# Altium PCB TSAL_Control - copia.PcbDoc (part 1 of 2)
Units mm, origin at the board's own origin, x right, y up, seen from the top; angles counter-clockwise.
Board outline 110 x 55.6 mm, 4 copper layers (Top Layer, GND, PWR, Bottom Layer), stack 1.488 mm thick; 168 components, 78 nets, 452 pads, 56 vias.
Unrouted connection lines stored in the file: 329.
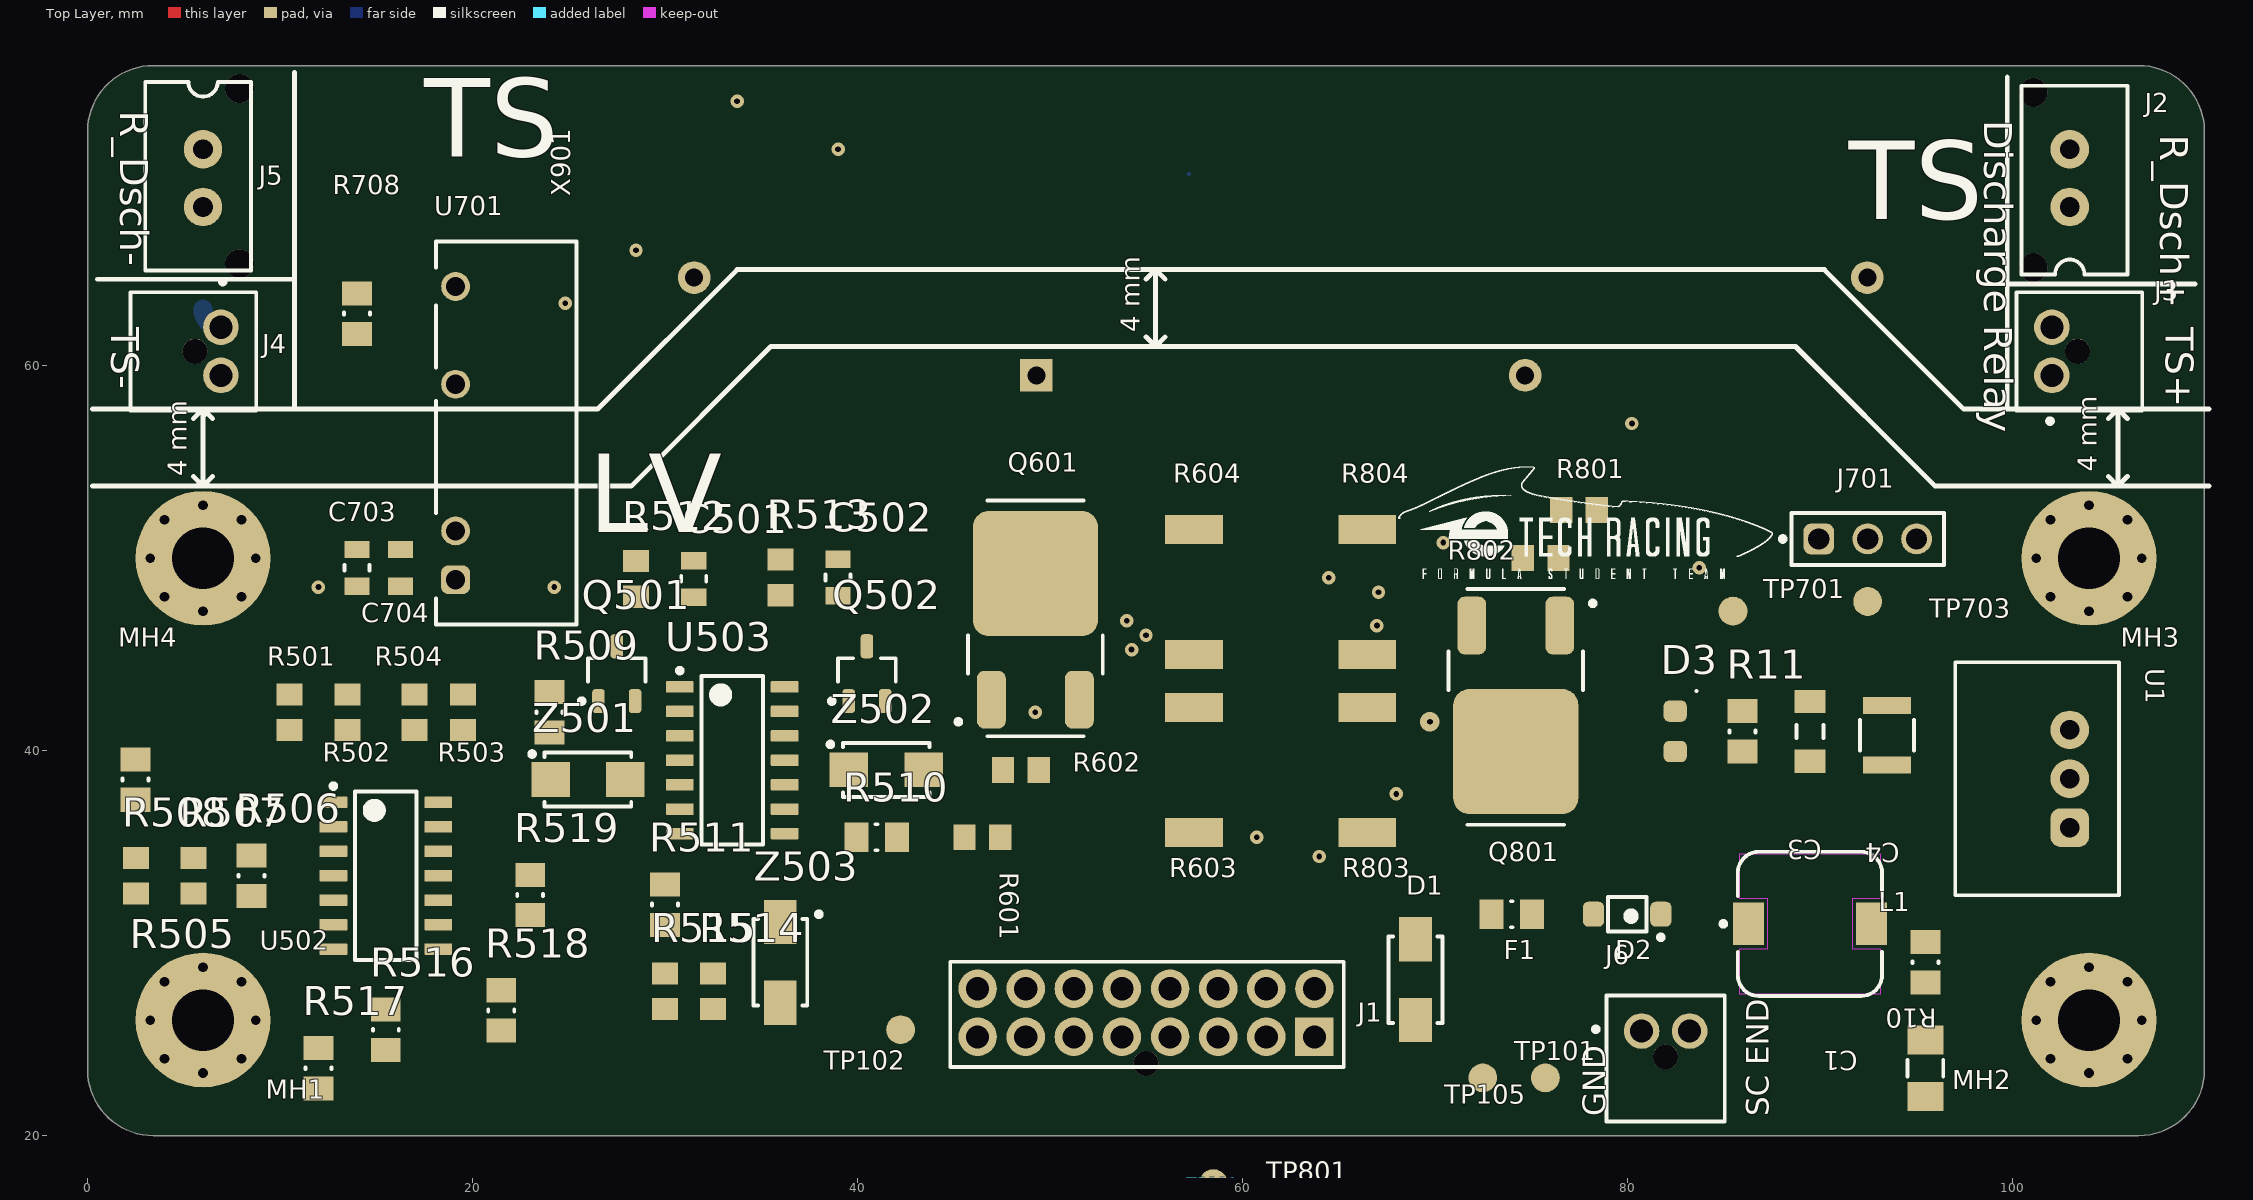
[diagram p0: Top Layer view]
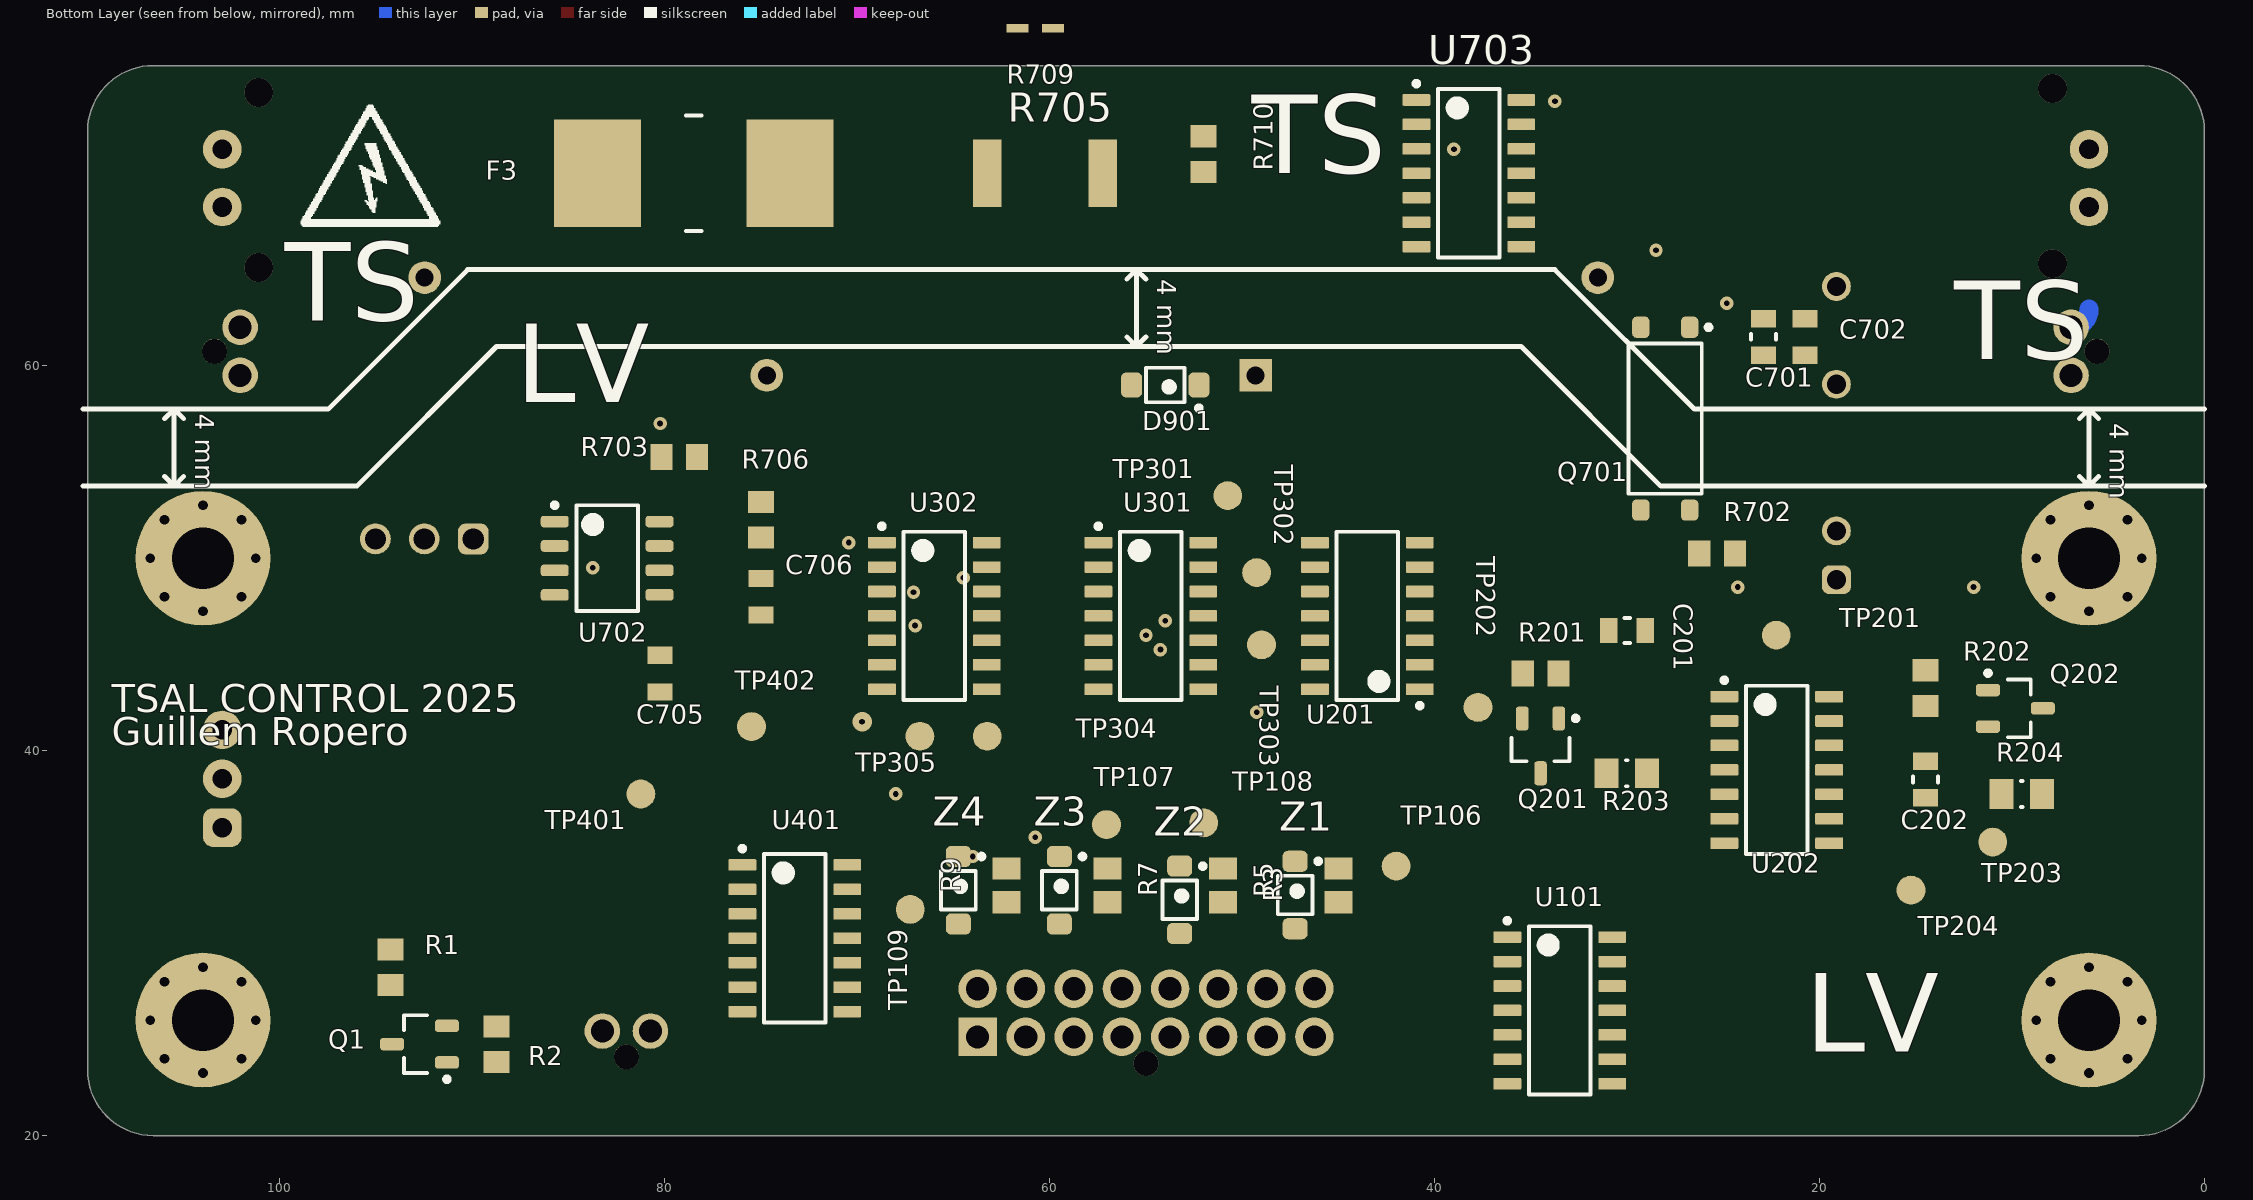
[diagram p1: Bottom Layer view, seen from below]
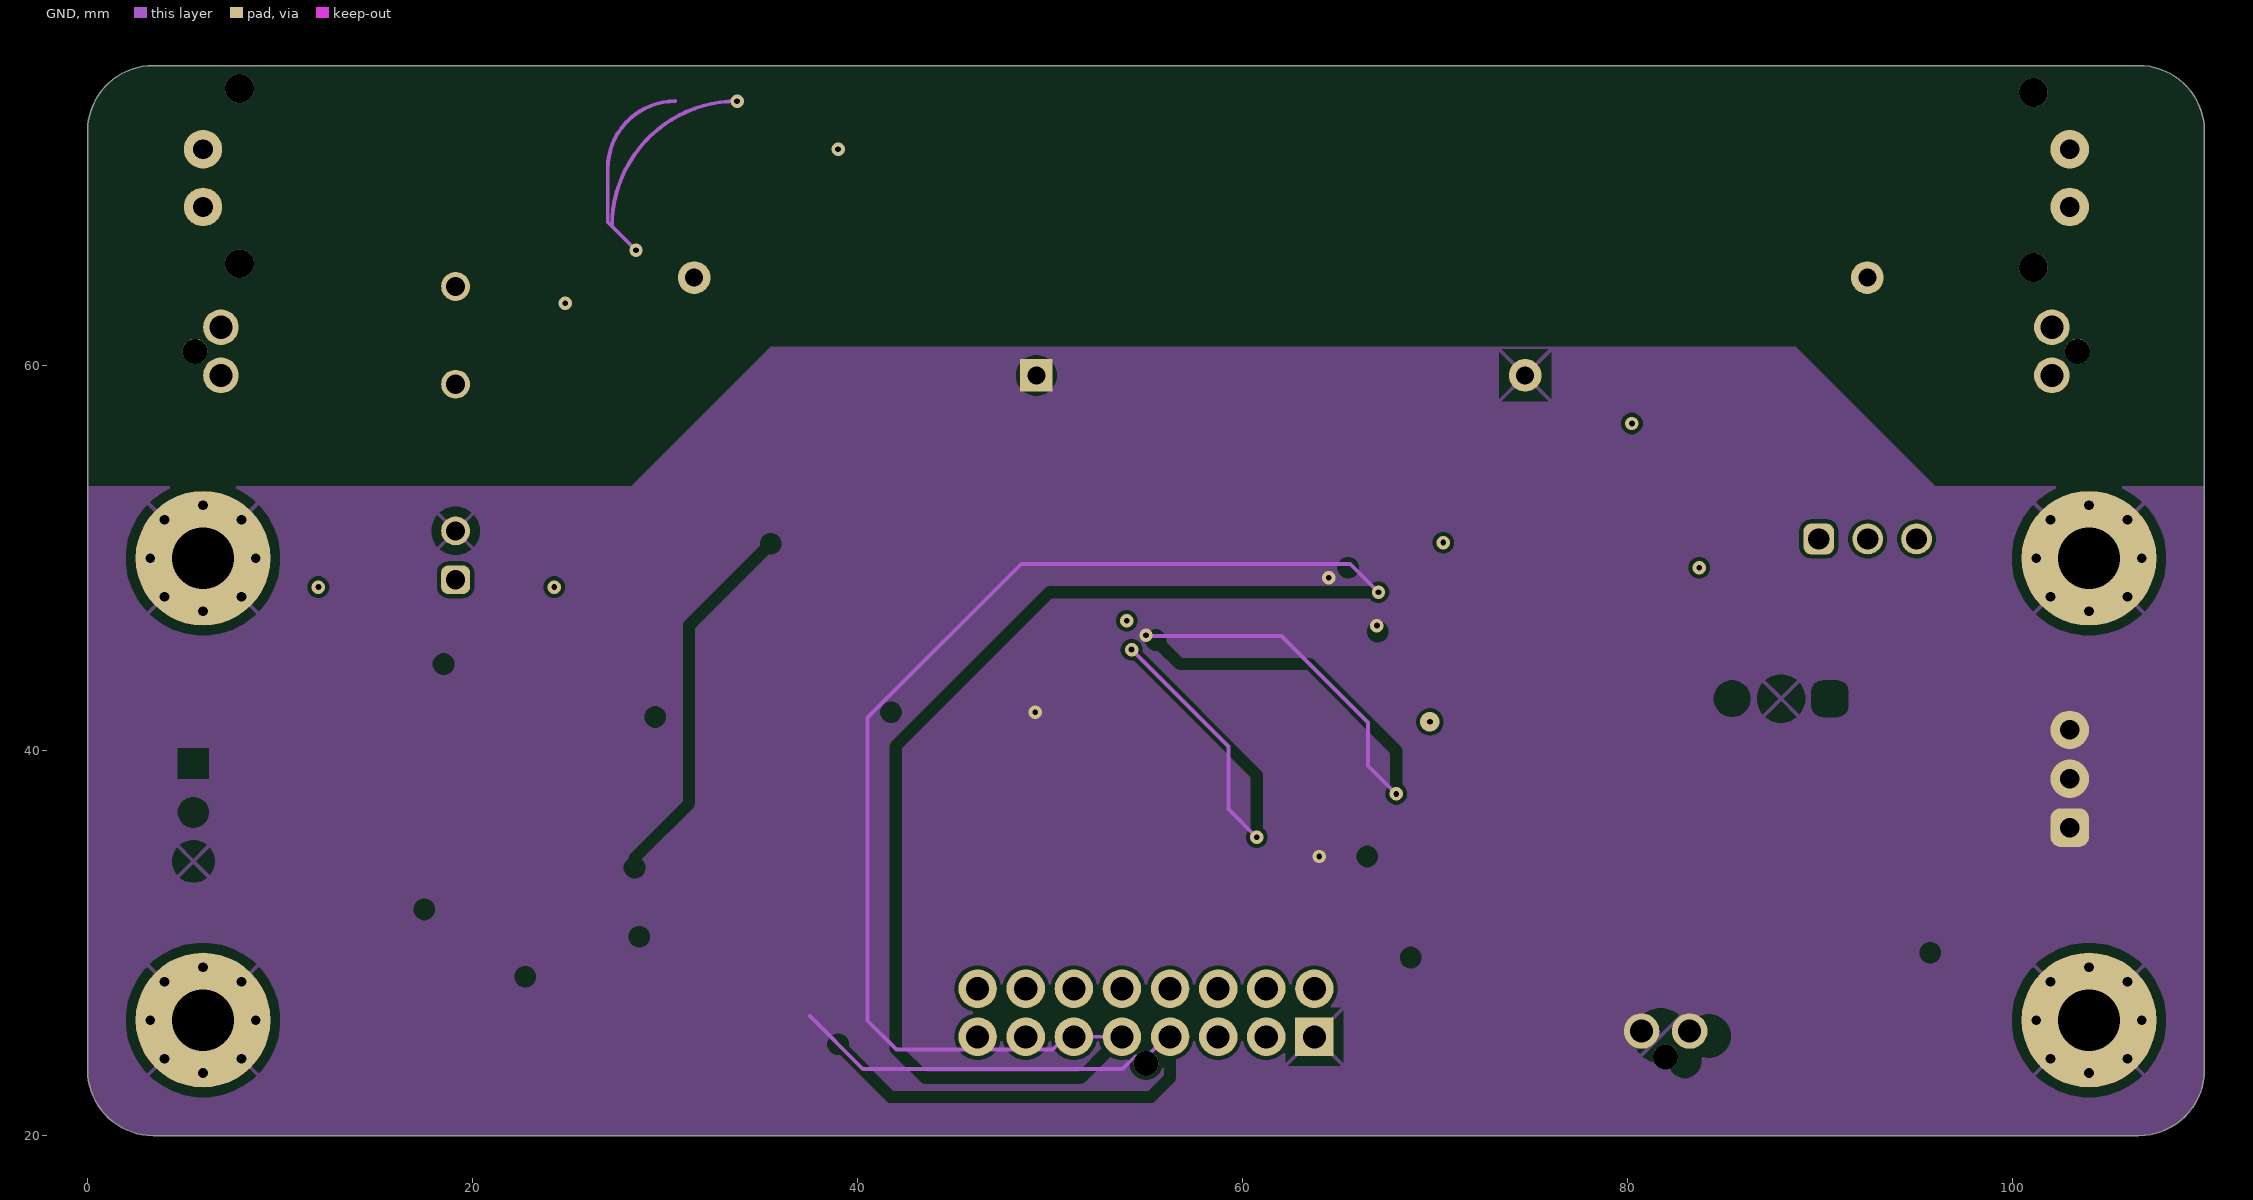
[diagram p2: GND]
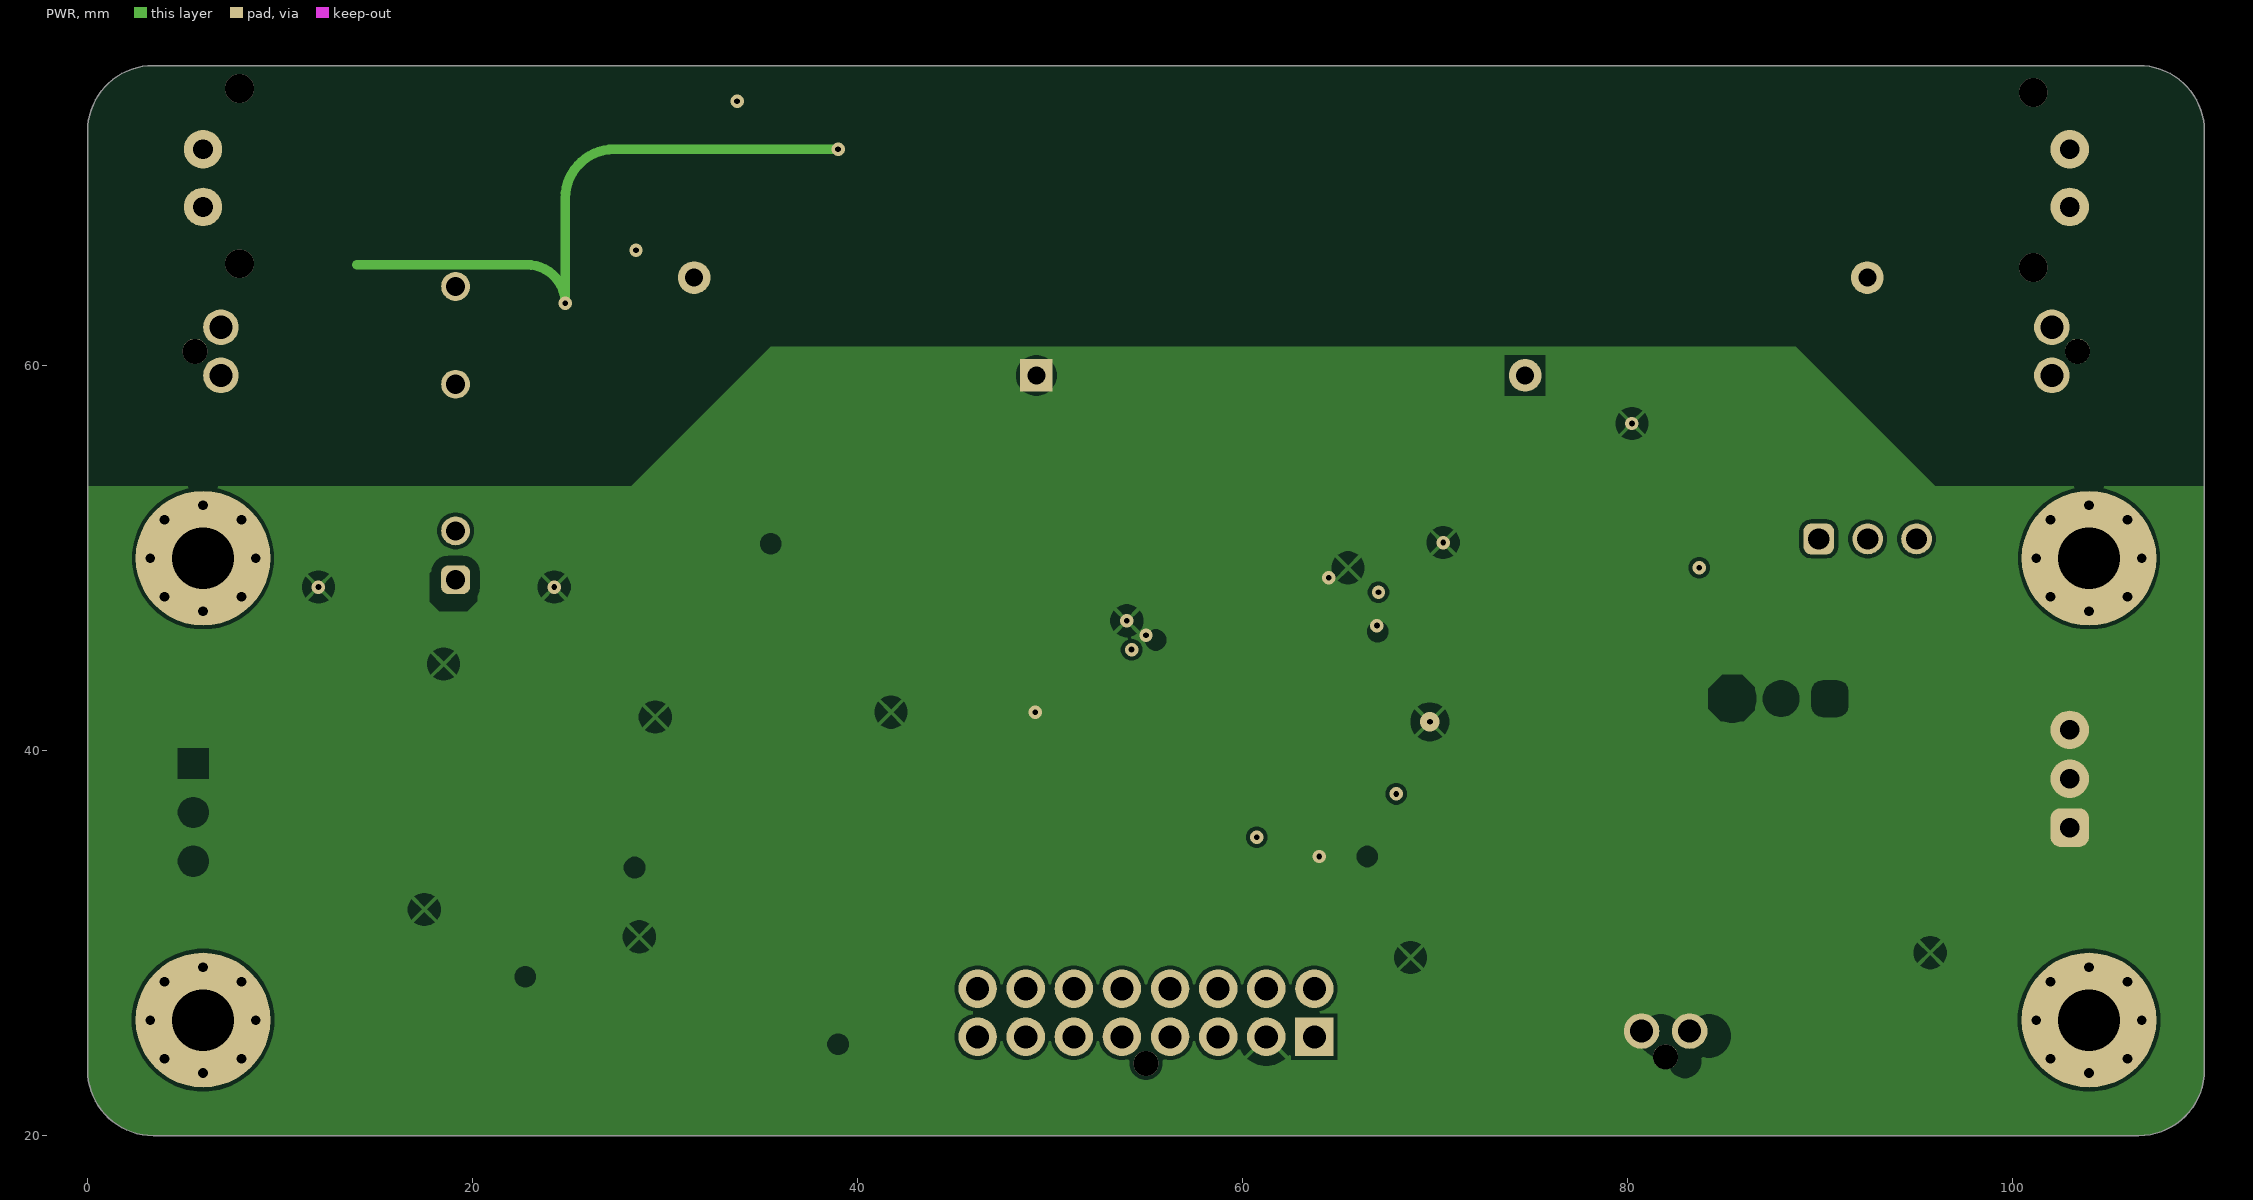
[diagram p3: PWR]

## Layer stack, top to bottom
Top Solder: solder mask 0.01, Solder Resist, Dk 3.5
Top Layer: signal copper 0.035
Dielectric 2: prepreg 0.1, PP-006, Dk 4.1
GND: signal copper 0.009
Dielectric 6: prepreg 0.1, PP-006, Dk 4.1
Dielectric 1: dielectric 1, FR-4, Dk 4.8
Dielectric 7: prepreg 0.1, PP-006, Dk 4.1
PWR: signal copper 0.009
Dielectric 3: prepreg 0.1, PP-006, Dk 4.1
Bottom Layer: signal copper 0.035
Bottom Solder: solder mask 0.01, Solder Resist, Dk 3.5

## Board outline
0,23.414 0,72 0,72.186 cw(c3.414,72.186) 3.414,75.6 106.5,75.6 106.586,75.6 cw(c106.586,72.186) 110,72.186 110,72 110,23.414 cw(c106.586,23.414) 106.586,20 106.5,20 3.414,20 cw(c3.414,23.414)

## Design rules (kind name [scope] priority, off if disabled: settings)
Clearance Clearance_TS-LVS [InNetClass('TS') vs InNetClass('LVS')] p1: gap=4 ignorepadtopadclearanceinfootprint=FALSE
Clearance Clearance_std [All] p2: gap=0.2 ignorepadtopadclearanceinfootprint=FALSE
ComponentClearance [All] p1: gap=0.2 collisioncheckmode=3 verticalgap=0.2 showdistances=FALSE
HoleSize [All] p1: absolutevalues=TRUE maxlimit=4 minlimit=0.2 maxpercent=80.000 minpercent=20.000
PasteMaskExpansion [All] p1: expansion=0.15
PlaneClearance [All] p1: clearance=0.5
PlaneConnect [All] p1: planeconnectstyle=Relief reliefexpansion=0.5 reliefentries=4 reliefconductorwidth=0.2 reliefairgap=0.2
PolygonConnect [All] p1: connectstyle=Relief reliefconductorwidth=0.2 reliefentries=4 polygonreliefangle="45 Angle" airgapwidth=0.5
RoutingVias [All] p1: holewidth=0.3 width=0.7 viastyle="Through Hole" minholewidth=0.2 minwidth=0.5 maxholewidth=4 maxwidth=8
SilkToSilkClearance [All] p1: silktosilkclearance=0
SilkToSolderMaskClearance [IsPad] p1: minsilkscreentomaskgap=0.1 clearancetoexposedcopper=TRUE
SolderMaskExpansion [All] p1: expansion=0.1 istentingtop=FALSE
UnRoutedNet [All] p1: checkbadconnections=TRUE
Width [All] p1: maxlimit=3 minlimit=0.2 preferedwidth=0.5
22 further rules are at their usual default settings.

## Classes and differential pairs
component class Discharge_circuit: D901 R901 TP901 U901 X901
component class "TSAL Red": C701 C702 C703 C704 C705 C706 HV_DET_TRIG J701 Q701 R701 R702 R703 R704 R705 R706 R707 R708 R709 R710 TP701 TP702 TP703 TP704 TP705 TS_ON U701 U702 U703
component class "TSAL Green": AIR+_COIL AIR+_STATE AIR-_COIL AIR-_STATE C101 C111 HV_ACCU PRE_COIL PRE_STATE SC_END TP101 TP102 TP103 TP104 TP105 TP106 TP107 TP108 TP109 TS_OFF U101
component class "Relay Implausibility": AIR+_IMPL AIR-_IMPL C301 C302 C333 PRE_IMPL RELAY_STATE_DET RELAYS_IMPL TP301 TP302 TP303 TP304 TP305 U301 U302
component class "Red Driver": Q801 R801 R802 R803 R804 TP801 TP802 TSAL_RED
component class Implausibilities: C201 C202 C203 C204 C223 IMPL_UNDLY IMPLAUSIBILITIES LATCH_RST Q201 Q202 R201 R202 R203 R204 SAFE_STATE TP201 TP202 TP203 TP204 U201 U202
component class TSAL_Control: C1 C3 C4 D1 D2 D3 F1 F3 F_DC_BUS1 F_DC_BUS? F_TS-? J2 J3 J4 J5 J6 J_TS+_DC_BUS1 J_TS+_DC_BUS? J_TS- L1 MH1 MH2 MH3 MH4 Q1 R1 R2 R3 R5 R7 R9 R10 R11 U1 Z1 Z2 Z3 Z4
component class SCS: AIR+_SCS AIR-_SCS C501 C502 C503 C504 C505 C555 HV_ACCU_SCS PRE_SCS Q501 Q502 R501 R502 R503 R504 R505 R506 R507 R508 R509 R510 R511 R512 R513 R514 R515 R516 R517 R518 R519 SCS_ERROR TP501 TP502 TP503 TP504 TP505 TP506 TP507 TP508 TP509 TP510 TP511 TP512 TP513 U501 U502 U503 V_REF Z501 Z502 Z503
component class "EV 4.10.14": C401 C444 NO_HV_REL_CLS NOT_INT_REL_STATE TP401 TP402 U401
component class "Green Driver": Q601 R601 R602 R603 R604 TP601 TP602 TSAL_GREEN

## Components (designator, comment, footprint, x,y, rotation, side; value= is the part's Value field where it differs from the comment)
C1 "C1u-50V-1206" FP-CL31-IPC_A 95.5,23.5 r270 top value=1µF
C3 "C100n-25V-1206FNPC-X7R" C1206FNPC-RW 89.5,41 r270 top value=100nF
C4 "C22u-25V-1210" WCAP-CSGP_1210_L3.2W2.5H2.5 93.5,40.8 r270 top
C101 "C100n-50V-0805FNPC-X7R" C0805FNPC-R 30.75,110 r90 top value=100nF
C111 "C15p-50V-0805FNPC-NP0" C0805FNPC-R 52,129.55 r90 top value=15pF
C201 "C10u-16V-0805FNPC-X5R" C0805FNPC-R 30,46.25 r180 bottom value=10µF
C202 "C10u-16V-0805FNPC-X5R" C0805FNPC-R 14.5,38.5 r270 bottom value=10µF
C203 "C100n-50V-0805FNPC-X7R" C0805FNPC-R 45.5,103 r90 top value=100nF
C204 "C100n-50V-0805FNPC-X7R" C0805FNPC-R 52.75,103 r90 top value=100nF
C223 "C15p-50V-0805FNPC-NP0" C0805FNPC-R 41,140.55 r90 top value=15pF
C301 "C100n-50V-0805FNPC-X7R" C0805FNPC-R 30.25,103 r90 top value=100nF
C302 "C100n-50V-0805FNPC-X7R" C0805FNPC-R 37.25,103 r90 top value=100nF
C333 "C15p-50V-0805FNPC-NP0" C0805FNPC-R 29,140.5 r90 top value=15pF
C401 "C100n-50V-0805FNPC-X7R" C0805FNPC-R 54,92.55 r90 top value=100nF
C444 "C15p-50V-0805FNPC-NP0" C0805FNPC-R 29,130.75 r90 top value=15pF
C501 "C100n-50V-0805FNPC-X7R" C0805FNPC-R 31.5,48.925 r270 top value=100nF
C502 "C100n-50V-0805FNPC-X7R" C0805FNPC-R 39,49 r270 top value=100nF
C503 "C100n-50V-0805FNPC-X7R" C0805FNPC-R 30.75,93.5 r90 top value=100nF
C504 "C100n-50V-0805FNPC-X7R" C0805FNPC-R 38,93.5 r90 top value=100nF
C505 "C100n-50V-0805FNPC-X7R" C0805FNPC-R 45.5,93.5 r90 top value=100nF
C555 "C15p-50V-0805FNPC-NP0" C0805FNPC-R 41,130 r90 top value=15pF
C701 "C1u-50V-0805FNPC-X7R" C0805FNPC-R 22.921,61.5 r270 bottom value=1µF
C702 "C100n-16V-0805" WCAP-CSGP_0805_L2W1.25H0.8_Reflow 20.75,61.5 r270 bottom
C703 "C1u-50V-0805FNPC-X7R" C0805FNPC-R 14,49.5 r90 top value=1µF
C704 "C100n-16V-0805" WCAP-CSGP_0805_L2W1.25H0.8_Reflow 16.25,49.5 r90 top
C705 "C100n-16V-0805" WCAP-CSGP_0805_L2W1.25H0.8_Reflow 80.25,44 r270 bottom value=100nF
C706 "C22u-25V-0805" WCAP-CSGP_0805_L2W1.25H0.8_Reflow 75,48 r270 bottom value=22uF
D1 "TVS_33V_400W" WE-TVSP_DO-214AC_Bidirectional 69,28.1 r270 top
D2 "DSC-0.5/30-SOD123" DSC-SOD123 80,31.5 r180 top
D3 "LEDGS-0805-450" LED_0805_WE 82.5,41 r270 top
D901 "DSC-0.5/30-SOD123" DSC-SOD123 54,59 r0 bottom
F1 "MFU0805FF00500P500" 0805 74,31.5 r270 top value=0.5A-50V
F3 "Fuse_1A_600V" Fuse_485001 78.5,70 r0 bottom
J1 "J_NanoFit_2x8_V" J_NanoFit_2x8_V 55,30 r180 top
J2 "J_MicroFit_2x1" J_MicroFit_2x1 103,68.25 r270 top
J3 "J_NanoFit_1x2" FP-105309-1102-MFG 103.5,60.75 r90 top
J4 "J_NanoFit_1x2" FP-105309-1102-MFG 5.5,60.75 r270 top
J5 "J_MicroFit_2x1" J_MicroFit_2x1 6,71.25 r90 top
J6 "J_NanoFit_1x2" FP-105309-1102-MFG 82,24 r0 top
J701 "3Pin-Pinheader" 61300311121 92.5,51 r0 top
L1 "3.3uH" WE-PD_7345 89.5,31 r0 top
MH1 "Mounting_Hole_M3" Mounting_Hole_M3 6,26 r0 top
MH2 "Mounting_Hole_M3" Mounting_Hole_M3 104,26 r0 top
MH3 "Mounting_Hole_M3" Mounting_Hole_M3 104,50 r0 top
MH4 "Mounting_Hole_M3" Mounting_Hole_M3 6,50 r0 top
Q1 "TRT-NCH" TRT-NCH-3/35-CPH 92.75,24.75 r0 bottom
Q201 "TRT-PCH-2/30-BSS" TRT-PCH-2/30-BSS 34.5,40.25 r270 bottom
Q202 "TRT-PCH-2/30-BSS" TRT-PCH-2/30-BSS 9.825,42.2 r180 bottom
Q501 "TRT-NCH-8/40-SQ" TRT-NCH-3/35-CPH 27.5,44 r90 top
Q502 "TRT-NCH-8/40-SQ" TRT-NCH-3/35-CPH 40.5,44 r90 top
Q601 "TRT-NCH" TRT-NCH-D2PAK 49.25,46.75 r0 top
Q701 "Optocoupler" WL-OCPT_LSOP4 28.02,57.25 r270 bottom
Q801 "TRT-NCH" TRT-NCH-D2PAK 74.214,42.4 r180 top
R1 "10kR" R0805FTK 94.25,28.75 r270 bottom value=10k
R2 "R10k-0805FTK" R0805FTK 88.75,24.75 r90 bottom value=10kR
R3 "R100k-0805" RESC2013X70X40NL20T20 45,33 r90 bottom value=100k
R5 "R100k-0805" RESC2013X70X40NL20T20 51,33 r90 bottom value=100k
R7 "R100k-0805" RESC2013X70X40NL20T20 57,33 r90 bottom value=100k
R9 "R100k-0805" RESC2013X70X40NL20T20 62.25,33 r90 bottom value=100k
R10 "R10_0805_0.25W" 0805 95.5,29 r0 top
R11 "R1K-0805-0.5W" 0805 86,41 r180 top value=1k
R201 "R10k-0805FTK" R0805FTK 34.5,44 r0 bottom value=10k
R202 "R10k-0805FTK" R0805FTK 14.5,43.25 r270 bottom value=10k
R203 "R1K-0805-0.5W" 0805 30.021,38.829 r270 bottom value=1k
R204 "R1K-0805-0.5W" 0805 9.5,37.75 r90 bottom value=1k
R501 "R1k-0805FTK" R0805FTK 10.5,42 r270 top value=1k
R502 "R1k-0805FTK" R0805FTK 13.5,42 r270 top value=1k
R503 "R1k-0805FTK" R0805FTK 19.5,42 r270 top value=1k
R504 "R1k-0805FTK" R0805FTK 17,42 r270 top value=1k
R505 "R12K4-0805-0.125W" 0805 2.5,38.5 r180 top value=12.4k
R506 "R1K-0805-0.5W" 0805 8.515,33.5 r180 top value=1k
R507 "R100-0805FTK" R0805FTK 5.515,33.5 r270 top value=100
R508 "R100-0805FTK" R0805FTK 2.515,33.5 r270 top value=100
R509 "R2K_0.5W_0805" 0805 24,42 r180 top value=2k
R510 "R2K_0.5W_0805" 0805 41,35.5 r270 top value=2k
R511 "R1K-0805-0.5W" 0805 30,32 r180 top value=1k
R512 "R1k-0805FTK" R0805FTK 28.5,48.925 r270 top value=1k
R513 "R1k-0805FTK" R0805FTK 36,49 r270 top value=1k
R514 "R100-0805FTK" R0805FTK 32.5,27.5 r270 top value=100
R515 "R100-0805FTK" R0805FTK 30,27.5 r270 top value=100
R516 "R560K-0805" 0805 15.5,25.5 r180 top value=560k
R517 "R560K-0805" 0805 12,23.5 r180 top value=560k
R518 "R560K-0805" 0805 21.5,26.5 r180 top value=560k
R519 "R560K-0805" 0805 23,32.5 r180 top value=560k
R601 "R100-0805FTK" R0805FTK 46.5,35.5 r0 top value=100
R602 "R1k-0805FTK" R0805FTK 48.5,39 r0 top value=1k
R603 "R15_3521_2W" R_3521 57.5,39 r90 top value=15
R604 "R15_3521_2W" R_3521 57.5,48.25 r90 top value=15
R701 "R470-0805FTK" R0805FTK 85,92 r90 bottom value=470
R702 "R10k-0805FTK" R0805FTK 25.325,50.25 r0 bottom value=10k
R703 "R100-0805FTK" R0805FTK 79.25,55.25 r180 bottom value=100
R704 "R10k_0805_0.25W" 0805 77.75,92.75 r180 bottom
R705 "R2M-2512FTK" R2512FTK 60.25,70 r180 bottom
R706 "R10k-0805FTK" R0805FTK 75,52 r270 bottom value=10k
R707 "R51k_0805" 0805 70.5,92.75 r180 bottom value=51k
R708 "R2K_0.5W_0805" 0805 14,62.71 r0 top value=2k
R709 "R100-0805FTK" R0805FTK 60.75,78 r180 bottom value=100
R710 "R100-0805FTK" R0805FTK 52,71 r90 bottom value=100
R801 "R100-0805FTK" R0805FTK 77.5,52.5 r180 top value=100
R802 "R1k-0805FTK" R0805FTK 75.5,50 r180 top value=1k
R803 "R15_3521_2W" R_3521 66.5,39 r90 top value=15
R804 "R15_3521_2W" R_3521 66.5,48.25 r90 top value=15
R901 "R10k_0805_0.25W" 0805 95,93.25 r0 top
TP101 "TestPoint" TestPoint 72.5,23 r90 top
TP102 "TestPoint" TestPoint 42.25,25.5 r90 top
TP103 "TestPoint" TestPoint 25,12.25 r90 top
TP104 "TestPoint" TestPoint 22,14 r90 top
TP105 "TestPoint" TestPoint 75.75,23 r90 top
TP106 "TestPoint" TestPoint 42,34 r90 bottom
TP107 "TestPoint" TestPoint 57.05,36.158 r90 bottom
TP108 "TestPoint" TestPoint 52,36.25 r90 bottom
TP109 "TestPoint" TestPoint 67.25,31.75 r90 bottom
TP201 "TestPoint" TestPoint 22.25,46 r90 bottom
TP202 "TestPoint" TestPoint 37.75,42.25 r90 bottom
TP203 "TestPoint" TestPoint 11,35.25 r90 bottom
TP204 "TestPoint" TestPoint 15.25,32.75 r90 bottom
TP301 "TestPoint" TestPoint 50.75,53.25 r90 bottom
TP302 "TestPoint" TestPoint 49.25,49.25 r90 bottom
TP303 "TestPoint" TestPoint 49,45.5 r90 bottom
TP304 "TestPoint" TestPoint 63.25,40.75 r90 bottom
TP305 "TestPoint" TestPoint 66.75,40.75 r90 bottom
TP401 "TestPoint" TestPoint 81.25,37.75 r90 bottom
TP402 "TestPoint" TestPoint 75.5,41.25 r180 bottom
TP501 "TestPoint" TestPoint 91.5,119.5 r90 top
TP502 "TestPoint" TestPoint 158.5,116.25 r180 top
TP503 "TestPoint" TestPoint 83,120.25 r90 top
TP504 "TestPoint" TestPoint 56.25,120.25 r90 top
TP505 "TestPoint" TestPoint 65.25,120.25 r90 top
TP506 "TestPoint" TestPoint 156.5,120.5 r180 top
TP507 "TestPoint" TestPoint 161.25,114.25 r180 top
TP508 "TestPoint" TestPoint 74,120.25 r90 top
TP509 "TestPoint" TestPoint 165,116.25 r180 top
TP510 "TestPoint" TestPoint 30.25,120.25 r90 top
TP511 "TestPoint" TestPoint 167.75,114.25 r180 top
TP512 "TestPoint" TestPoint 39,120.25 r90 top
TP513 "TestPoint" TestPoint 47.5,120.25 r90 top
TP601 "TestPoint" TestPoint 62.5,14.5 r90 top
TP602 "TestPoint" TestPoint 138.75,119.75 r180 top
TP701 "TestPoint" TestPoint 85.5,47.25 r90 top
TP702 "TestPoint" TestPoint 117.5,120 r90 top
TP703 "TestPoint" TestPoint 92.5,47.75 r90 top
TP704 "TestPoint" TestPoint 106.5,120.5 r90 top
TP705 "TestPoint" TestPoint 97.5,120.5 r90 top
TP801 "TestPoint" TestPoint 58.5,17.5 r90 top
TP802 "TestPoint" TestPoint 124.75,119.75 r180 top
TP901 "TestPoint" TestPoint 148,120.5 r90 top
U1 "DCDC-36V/12V-1A" WPME-FDSM_SIP-3_L11.6W8H10.4 101.3,38.54 r90 top
U101 "CD4073BM" D0014A_N 33.5,26.5 r180 bottom
U201 "CD4072BM" D0014A_N 43.5,47 r0 bottom
U202 "CD4011BM" D0014A_N 22.225,39 r180 bottom
U301 "CD4070BM" D0014A_N 54.75,47 r180 bottom
U302 "CD4073BM" D0014A_N 66,47 r180 bottom
U401 "CD4023BM" D0014A_N 73.25,30.25 r180 bottom
U501 "CD4072BM" D0014A_N 13.5,12.5 r180 bottom
U502 "LM339D" D0014A_N 15.5,33.5 r0 top
U503 "LM339D" D0014A_N 33.5,39.5 r0 top
U701 "DCDC_ISO_12VIN_5VOUT" WPME-FISM_SIP-7_L19.65W7.05H10.16 21.75,56.5 r90 top
U702 "Timer_SA555" Timer_SA555 83,50 r180 bottom
U703 "LM339D" D0014A_N 38.225,70 r180 bottom
U901 "PLB171" PLB171 101.75,85.5 r0 top
X901 "HV-Relay-SPST-NC-24V" HV-Relay-SPST-NC-24V 31.52,64.58 r0 top
Z1 "DZ-10V/75-SOD-123" DSC-SOD123 47.25,32.5 r270 bottom
Z2 "DZ-10V/75-SOD-123" DSC-SOD123 53.25,32.25 r270 bottom
Z3 "DZ-10V/75-SOD-123" DSC-SOD123 59.5,32.75 r270 bottom
Z4 "DZ-10V/75-SOD-123" DSC-SOD123 64.75,32.75 r270 bottom
Z501 "DZ-5.6V-DO-214AC" DO-214AC 26,38.5 r0 top
Z502 "DZ-5.6V-DO-214AC" DO-214AC 41.5,39 r0 top
Z503 "DZ-3V6-1.25W-DO-214AC" DZ-DO-214AC 36,29 r270 top

## Footprints (in the part's own frame and the unit in brackets; to place one, negate y for a bottom-side part, rotate by r counter-clockwise, add the part's x,y. Pads: shape width x height; smd on the part's side, far side on the other; paste and mask are expansions set on the pad)
0805 [mm] "Chip Resistor, 2-Leads, Body 2,60x1,50mm, IPC Medium Density"
  rect 1.55x1.25 smd: 1(0,-1.05) 2(0,1.05)
  silkscreen extent -0.67,-0.05 0.67,0.05, body extent -0.75,-1.3 0.75,1.3, height 0.6
61300311121 [mm] "Pin Header, pitch 2.54 mm, THT, Vertical, single row, 3p"
  rrect50% 1.6x1.6 hole 1.1: 1(-2.54,0)
  round 1.6 hole 1.1: 2(0,0) 3(2.54,0)
  silkscreen extent -4.53,-1.35 3.96,1.35, body extent -3.81,-1.27 3.81,1.27, height 8.57
C0805FNPC-R [mm]
  rect 0.9x1.3 smd: 1(-0.95,0) 2(0.95,0)
  silkscreen extent -0.15,-0.65 0.15,0.65, body extent -1.03,-0.63 0.97,0.63, height 0.96
C1206FNPC-RW [mm] "Chip Capacitor, 2-Leads, Body 3,20x1,60mm, IPC Medium Density"
  rect 1.2x1.6 smd: 1(-1.55,0) 2(1.55,0)
  silkscreen extent -0.35,-0.7 0.35,0.7, body extent -1.59,-0.77 1.61,0.83, height 0.91
D0014A_N [mm] "SOIC, 14-Leads, Body 8.75x4mm, Pitch 1.27mm, IPC Medium Density"
  rrect17% 1.45x0.6 smd: 1(-2.725,3.81) 2(-2.725,2.54) 3(-2.725,1.27) 4(-2.725,0) 5(-2.725,-1.27) 6(-2.725,-2.54) 7(-2.725,-3.81) 8(2.725,-3.81) 9(2.725,-2.54) 10(2.725,-1.27) 11(2.725,0) 12(2.725,1.27) 13(2.725,2.54) 14(2.725,3.81)
  silkscreen extent -2.85,-4.38 1.6,4.78, body extent -3.02,-4.32 3.02,4.32, height 1.59
DO-214AC [mm] "Molded Diode, 2-Leads, Body 4,25x2,67mm, IPC Medium Density"
  rect 2x1.8 smd: A(1.94,0) K(-1.94,0)
  silkscreen extent -3.02,-1.4 2.25,1.45, body extent -2.47,-1.4 2.47,1.4, height 2.29
DSC-SOD123 [mm] "SOIC, 2-Leads, Body 1,60x2,69mm, Pitch 1,27mm, IPC Low Density"
  rrect50% 1.1x1.3 smd: A(1.75,0) K(-1.75,0)
  silkscreen extent -1.88,-0.9 1,1.32, body extent -1.86,-0.8 1.86,0.8, height 1.36
DZ-DO-214AC [mm] "Power TVS Diode, 2-Leads. body 4.24x2.67mm"
  rect 2.3x1.7 smd: A(2.1,0) K(-2.1,0)
  silkscreen extent -2.6,-1.4 2.25,2.1, body extent -2.56,-1.33 2.56,1.34, height 2.24
FP-105309-1102-MFG [mm]
  round 1.85 hole 1.2 paste-2539.97 mask+0: 1(-1.25,1.43) 2(1.25,1.43)
  round 1.3 hole 1.3 unplated paste-2539.97 mask+0: ""(0,0.09)
  silkscreen extent -3.75,-3.27 3.07,3.27, body extent -3.17,-3.37 3.17,3.37, height 0.25
FP-CL31-IPC_A [mm]
  rect 1.505x1.858 smd paste+0 mask+0: 1(-1.476,0) 2(1.476,0)
  silkscreen extent -0.42,-0.93 0.42,0.93, body extent -2.73,-1.43 2.73,1.43, height 0.25
Fuse_485001 [mm]
  rect 4.5x5.6 smd: 1(-5,0) 2(5,0)
  silkscreen extent -0.4,-3 0.4,3, body extent -6.05,-2.25 6.05,2.25, height 4.5
HV-Relay-SPST-NC-24V [mm]
  round 1.7 hole 0.94: 1(60.96,0) 2(43.18,-5.08) 4(0,0)
  rect 1.7x1.7 hole 0.94: 3(17.78,-5.08)
  body extent -5.08,-9.02 66.04,9.01, height 19.15
J_MicroFit_2x1 [mm]
  round 2 hole 1.02: 1(0,0) 2(-3,0)
  silkscreen extent -6.3,-2.5 3.5,3, body extent -6.32,-2.47 3.32,3.1, height 10
J_NanoFit_2x8_V [mm]
  round 2 hole 1.2: 1(8.75,4.87) 2(6.25,4.87) 3(3.75,4.87) 4(1.25,4.87) 5(-1.25,4.87) 6(-3.75,4.87) 7(-6.25,4.87) 9(8.75,2.369) 10(6.25,2.369) 11(3.75,2.369) 12(1.25,2.369) 13(-1.25,2.369) 14(-3.75,2.369) 15(-6.25,2.369) 16(-8.75,2.369)
  rect 2x2 hole 1.2: 8(-8.75,4.87)
  round 1.3 hole 1.3: A(0,6.25)
  silkscreen extent -10.27,0.97 10.17,6.43, body extent -10.5,0.68 10.44,9.53, height 10.18
LED_0805_WE [mm] "SODFL, 2-Leads, Body 1,60x3,20mm, IPC Medium Density"
  rrect50% 1.1x1.2 smd: A(1.05,0) K(-1.05,0)
  silkscreen extent -2.15,1.05 -2.05,1.15, body extent -1,-0.62 1,0.63, height 0.7
Mounting_Hole_M3 [mm]
  round 7 hole 3.2: 1(0,0)
PLB171 [mm]
  rrect50% 0.65x1.55 smd: 1(0,0) 2(2.54,0) 3(5.08,0) 4(7.62,0) 5(7.62,8.7) 6(0,8.7)
  silkscreen extent -0.86,1.17 8.79,7.52, body extent -1.02,-0.35 8.64,9.05, height 2.29
R0805FTK [mm] "Chip Resistor, 2-Leads, Body 2,00x1,25mm, IPC Medium Density"
  rect 1.15x1.35 smd: 1(-0.925,0) 2(0.925,0)
  body extent -1,-0.63 1,0.63, height 0.65
R2512FTK [mm]
  rect 1.5x3.5 smd: 1(-3,0) 2(3,0)
  body extent -3.15,-1.6 3.15,1.6, height 0.66
R_3521 [mm]
  rect 1.5x3 smd: 1(-3.25,0) 2(3.25,0)
  body extent -3.17,-1.6 3.17,1.6, height 0.65
RESC2013X70X40NL20T20 [mm] "Chip Resistor, 2-Leads, Body 2.00x1.25mm, IPC Medium Density"
  rect 1.15x1.45 smd: 1(-0.875,0) 2(0.875,0)
  body extent -1.1,-0.72 1.1,0.72, height 0.7
TestPoint [mm]
  round 1.5 smd: 1(0,0)
Timer_SA555 [mm] "SOIC, 8-Leads, Body 4,90x3,90mm, Pitch 1,27mm, IPC Medium Density"
  rrect50% 1.45x0.6 smd: 1(-2.725,1.905) 2(-2.725,0.635) 3(-2.725,-0.635) 4(-2.725,-1.905) 5(2.725,-1.905) 6(2.725,-0.635) 7(2.725,0.635) 8(2.725,1.905)
  silkscreen extent -2.85,-2.75 1.6,2.88, body extent -3.01,-2.45 3.01,2.45, height 1.63
TRT-NCH-3/35-CPH [mm] "SOT23, 3-Leads, Body 2,90x2,80mm, Pitch 0,95mm, IPC Low Density"
  rrect50% 1.25x0.65 smd: D(1.425,0) G(-1.425,0.95) S(-1.425,-0.95)
  silkscreen extent -1.55,-1.5 0.8,1.95, body extent -1.4,-1.45 1.4,1.45, height 1.06
TRT-NCH-D2PAK [mm] "SOT23, 3-Leads, Body 2,90x2,80mm, Pitch 0,95mm, IPC Low Density"
  rrect25% 6.5x6.5 smd: D(0,2.45)
  rrect50% 1.5x3 smd: G(-2.286,-4.1) S(2.286,-4.1)
  silkscreen extent -4.12,-6 3.5,6.25, body extent -3.29,-5.12 3.29,4.8, height 2.29
TRT-PCH-2/30-BSS [mm] "SOT23, 3-Leads, Body 2,90x2,80mm, Pitch 0,95mm, IPC Low Density"
  rrect50% 1.25x0.65 smd: D(1.425,0) G(-1.425,0.95) S(-1.425,-0.95)
  silkscreen extent -1.55,-1.5 0.8,1.95, body extent -1.4,-1.45 1.4,1.45, height 1.06
WCAP-CSGP_0805_L2W1.25H0.8_Reflow [mm] "Ceramic Capacitors, body 2x1.25mm"
  rect 0.9x1.3 smd: 1(-0.95,0) 2(0.95,0)
  body extent -1,-0.62 1,0.63, height 0.8
WCAP-CSGP_1210_L3.2W2.5H2.5 [mm] "Ceramic Capacitors, body 3.2x2.5mm"
  rect 0.9x2.5 smd: 1(-1.55,0) 2(1.55,0)
  silkscreen extent -0.8,-1.4 0.8,1.4, body extent -1.6,-1.25 1.6,1.25, height 2.5
WE-PD_7345 [mm] "SMT Shielded Power Inductor, 2-leads, body 7.3x7.3mm"
  rect 1.6x2.2 smd: 1(-3.2,0) 2(3.2,0)
  Top Layer keep-out region: -3.65,-3.65 -3.65,-1.3 -2.2,-1.3 -2.2,1.3 -3.65,1.3 -3.65,3.65 3.65,3.65 3.65,1.3 2.2,1.3 2.2,-1.3 3.65,-1.3 3.65,-3.65
  silkscreen extent -4.62,-3.75 3.75,3.75, body extent -3.65,-3.65 3.65,3.65, height 3.91
WE-TVSP_DO-214AC_Bidirectional [mm] "Power TVS Diode, 2-Leads. body 4.24x2.67mm"
  rect 2.3x1.7 smd: 1(-2.1,0) 2(2.1,0)
  silkscreen extent -2.25,-1.4 2.25,1.4, body extent -2.56,-1.33 2.56,1.34, height 2.24
WL-OCPT_LSOP4 [mm] "Optocoupler Phototransistor, body 7.6x3.6mm"
  rrect50% 1.1x0.9 smd: 1(-4.75,1.27) 2(-4.75,-1.27) 3(4.75,-1.27) 4(4.75,1.27)
  silkscreen extent -4.87,-1.9 3.9,2.37, body extent -5.1,-1.8 5.1,1.8, height 2.1
WPME-FDSM_SIP-3_L11.6W8H10.4 [mm] "Fixed Step Down Regulator Module, SIP-3, body 11.60x80mm"
  rrect50% 2x2 hole 1: 1(-2.54,-1.7)
  round 2 hole 1: 2(0,-1.7) 3(2.54,-1.7)
  silkscreen extent -6.05,-4.25 6.05,4.25, body extent -5.8,-4 5.8,4, height 10.45
WPME-FISM_SIP-7_L19.65W7.05H10.16 [mm] "Power Module, SIP7, body 19.65x7.05mm"
  rrect50% 1.5x1.5 hole 1 paste-2539.97: 1(-7.62,2.625)
  round 1.5 hole 1 paste-2539.97: 2(-5.08,2.625) 3(2.54,2.625) 4(7.62,2.625)
  silkscreen extent -9.95,-3.65 9.95,3.65, body extent -9.82,-3.52 9.82,3.52, height 10.16

## Part data
C1: library part CMP-001-00031-2, "Ceramic Capacitor, Multilayer, Ceramic, 50V, 10% +Tol, 10% -Tol, X7R, 15% TC, 1uF, Surface Mount, 1206, CL31B105KBHNNNE", Capacitor Type=Ceramic, Case/Package=1206, Max Operating Temperature=125°C, Min Operating Temperature=-55°C, Mounting Technology="Surface Mount", Pins=2, RoHS Compliant=Yes
C3: library part CMP-00062-3, "Cap Cer 0.1UF 25V X7R 1206", Case Code (Metric)=3216, Case/Package=1206, Manufacturer="Wurth Electronics", Manufacturer Part Number=885012208058, Max Operating Temperature=125°C, Min Operating Temperature=-55°C, Tolerance=10%, Voltage Rating=25V, .Creator=DO, Category=Capacitor, ComponentLink1Description=Datasheet, ComponentLink1URL=https://www.we-online.com/catalog/datasheet/885012208058.pdf, ComponentLink2Description="Where buy it", ComponentLink2URL=https://www.we-online.com/catalog/en/WCAP-CSGP-25VDC#885012208058, ComponentLink3Description=https://katalog.we-online.de/pbs/datasheet/885012208058.pdf?src-supplier=Digi-Key, ComponentLink3URL=https://katalog.we-online.de/pbs/datasheet/885012208058.pdf?src-supplier=Digi-Key, Design Item ID=C100n-25V-1206FNPC-X7R, Length=0.126inch, Mount="Surface Mount", Packaging="Tape and Reel", Pricing 1="1=0,11000, 10=0,10100, 100=0,09100, 500=0,08000 (USD)", RoHS=Yes, RoHS Compliant=Yes, Source=Passives.SchLib, Stock 1=4375, Thickness=0.035inch, Width=0.063inch
C4: library part CMP-001-00030-1, "Cap, 22Uf, 25V, Mlcc, 1210 Rohs Compliant: Yes", Capacitance=22uF
C101 C203 C204 C301 C302 C401 C501 C502 C503 C504 C505: library part CMP-00063-3, "Cap, 0.1ΜF, 50V, 10%, X7R, 0805", Case Code (Metric)=2012, Case/Package=0805, Dielectric=X7R, Manufacturer 1="Wurth Electronics", Manufacturer Part Number 1=885012207098, Max Operating Temperature=125°C, Min Operating Temperature=-55°C, Tolerance=10%, Voltage Rating=50V, .Creator=DR, Category="Ceramic Capacitors", ComponentLink1Description=http://www.farnell.com/datasheets/1958498.pdf?src-supplier=Farnell, ComponentLink1URL=http://www.farnell.com/datasheets/1958498.pdf?src-supplier=Farnell, ComponentLink2Description=http://www.farnell.com/datasheets/1958498.pdf?src-supplier=Element14, ComponentLink2URL=http://www.farnell.com/datasheets/1958498.pdf?src-supplier=Element14, ComponentLink3Description=https://katalog.we-online.de/pbs/datasheet/885012207098.pdf?src-supplier=Digi-Key, ComponentLink3URL=https://katalog.we-online.de/pbs/datasheet/885012207098.pdf?src-supplier=Digi-Key, ComponentLink4Description=http://www.farnell.com/datasheets/1958498.pdf?src-supplier=Newark, ComponentLink4URL=http://www.farnell.com/datasheets/1958498.pdf?src-supplier=Newark, Design Item ID=C100n-50V-0805FNPC-X7R, Length=0.079inch, Mount="Surface Mount", Packaging="Cut Tape", Pricing 1="100=0,10200, 500=0,07100, 2000=0,06100 (GBP)", REACH SVHC=Unknown, RoHS=Yes, RoHS Compliant=Yes, Source=Passives.SchLib, Stock 1=8000, Thickness=0.035inch, Voltage Rating (DC)=50V, Width=0.049inch
C111 C223 C333 C444 C555: library part CMP-00056-3, "Cap, 15PF, 50V, 5%, C0G/NP0, 0805", Case Code (Metric)=2012, Case/Package=0805, Manufacturer 1="Wurth Electronics", Manufacturer Part Number 1=885012007052, Max Operating Temperature=125°C, Min Operating Temperature=-55°C, Tolerance=5%, Voltage Rating=50V, .Creator=DR, Category="Ceramic Capacitors", ComponentLink1Description=http://www.farnell.com/datasheets/2031702.pdf?src-supplier=Farnell, ComponentLink1URL=http://www.farnell.com/datasheets/2031702.pdf?src-supplier=Farnell, ComponentLink2Description=http://katalog.we-online.de/pbs/datasheet/885012007052.pdf?src-supplier=Digi-Key, ComponentLink2URL=http://katalog.we-online.de/pbs/datasheet/885012007052.pdf?src-supplier=Digi-Key, ComponentLink3Description=https://katalog.we-online.de/pbs/datasheet/885012007052.pdf?src-supplier=Digi-Key, ComponentLink3URL=https://katalog.we-online.de/pbs/datasheet/885012007052.pdf?src-supplier=Digi-Key, Design Item ID=C15p-50V-0805FNPC-NP0, Length=0.079inch, Mount="Surface Mount", Packaging="Cut Tape", Pricing 1="1=0,10800, 10=0,05200, 25=0,05100, 50=0,04900, 100=0,04800, 250=0,04600, 500=0,04300 (USD)", RoHS=Yes, RoHS Compliant=Yes, Source=Passives.SchLib, Stock 1=815, Thickness=0.028inch, Width=0.049inch
C201 C202: library part CMP-00055-8, "Multilayer Ceramic Capacitor, Wcap-Csgp Series, 10 F, 20%, X5R, 16 V, 0805 [2012 Metric] Rohs Compliant: Yes", Case Code (Metric)=2012, Case/Package=0805, Dielectric=X5R, Manufacturer 1="Wurth Electronics", Manufacturer Part Number 1=885012107014, Max Operating Temperature=85°C, Min Operating Temperature=-55°C, Tolerance=20%, Voltage Rating=16V, .Creator=DR, Category="Ceramic Capacitors", ComponentLink1Description=http://www.farnell.com/datasheets/1958454.pdf?src-supplier=Farnell, ComponentLink1URL=http://www.farnell.com/datasheets/1958454.pdf?src-supplier=Farnell, ComponentLink2Description=http://www.farnell.com/datasheets/1958454.pdf?src-supplier=Element14, ComponentLink2URL=http://www.farnell.com/datasheets/1958454.pdf?src-supplier=Element14, ComponentLink3Description=https://katalog.we-online.de/pbs/datasheet/885012107014.pdf?src-supplier=Digi-Key, ComponentLink3URL=https://katalog.we-online.de/pbs/datasheet/885012107014.pdf?src-supplier=Digi-Key, ComponentLink4Description=http://www.farnell.com/datasheets/1958454.pdf?src-supplier=Newark, ComponentLink4URL=http://www.farnell.com/datasheets/1958454.pdf?src-supplier=Newark, Design Item ID=C10u-16V-0805FNPC-X5R, Length=0.079inch, Mount="Surface Mount", Packaging="Cut Tape", Pricing 1="50=0,21000, 250=0,20200, 500=0,19100, 1000=0,17400, 2500=0,14700 (GBP)", REACH SVHC=Unknown, RoHS=Yes, RoHS Compliant=Yes, Source=Passives.SchLib, Stock 1=81550, Thickness=0.057inch, Voltage Rating (DC)=16V, Width=0.049inch
C701 C703: library part CMP-00052-2, "Multilayer Ceramic Capacitor, Wcap-Csgp Series, 1 F, 10%, X7R, 50 V, 0805 [2012 Metric] Rohs Compliant: Yes", Case Code (Metric)=2012, Case/Package=0805, Dielectric=X7R, Manufacturer 1="Wurth Electronics", Manufacturer Part Number 1=885012207103, Max Operating Temperature=85°C, Min Operating Temperature=-55°C, Tolerance=10%, Voltage Rating=50V, .Creator=GP, Category="Ceramic Capacitors", ComponentLink1Description=http://www.farnell.com/datasheets/1958501.pdf?src-supplier=Farnell, ComponentLink1URL=http://www.farnell.com/datasheets/1958501.pdf?src-supplier=Farnell, ComponentLink2Description=http://www.farnell.com/datasheets/1958501.pdf?src-supplier=Element14, ComponentLink2URL=http://www.farnell.com/datasheets/1958501.pdf?src-supplier=Element14, ComponentLink3Description=https://katalog.we-online.de/pbs/datasheet/885012107003.pdf?src-supplier=Digi-Key, ComponentLink3URL=https://katalog.we-online.de/pbs/datasheet/885012107003.pdf?src-supplier=Digi-Key, ComponentLink4Description=http://www.farnell.com/datasheets/1958501.pdf?src-supplier=Newark, ComponentLink4URL=http://www.farnell.com/datasheets/1958501.pdf?src-supplier=Newark, Design Item ID=C1u-50V-0805FNPC-X7R, Length=0.079inch, Mount="Surface Mount", Packaging="Cut Tape", Pricing 1="50=0,27200, 250=0,25300, 500=0,22800, 1250=0,20100, 2500=0,17100 (GBP)", REACH SVHC=Unknown, RoHS=Yes, RoHS Compliant=Yes, Source=Passives.SchLib, Stock 1=5100, Thickness=0.053inch, Voltage Rating (DC)=50V, Width=0.049inch
C702 C704: library part CMP-001-00008-6, "Ceramic Capacitor, Multilayer, Ceramic, 16V, 10% +Tol, 10% -Tol, X7R, 15% TC, 0.1uF, Surface Mount, 0805", Capacitance=100nF, Capacitor Type=Ceramic, Pins=2, RoHS Compliant=Yes
C705: library part CMP-001-00008-6, "Ceramic Capacitor, Multilayer, Ceramic, 16V, 10% +Tol, 10% -Tol, X7R, 15% TC, 0.1uF, Surface Mount, 0805", Capacitor Type=Ceramic, Pins=2, RoHS Compliant=Yes
C706: library part CMP-001-00017-4, "885012107019"
D1: library part CMP-004-00003-1, "Trans Voltage Suppressor Diode, 400W, Bidirectional, 1 Element, Silicon, DO-214AC", Max Operating Temperature=150°C, Min Operating Temperature=-65°C, Pins=2, RoHS Compliant=Yes
D2 D901: library part CMP-00165-2, "VR=30V IF=500mA 30pF P=410mW", Average Rectified Current=500mA, Forward Voltage=430mV, Max Forward Surge Current (Ifsm)=5.5A, Max Repetitive Reverse Voltage (Vrrm)=30V, Max Reverse Current=130uA, Package Quantity=1, .Creator=GP, Category=Diode, ComponentLink1Description=Datasheet, ComponentLink2Description="Where buy it", ComponentLink3Description=https://datasheet.ciiva.com/30479/0900766b810e2512-30479401.pdf?src-supplier=RSComponents, ComponentLink3URL=https://datasheet.ciiva.com/30479/0900766b810e2512-30479401.pdf?src-supplier=RSComponents, ComponentLink4Description=https://datasheet.ciiva.com/34301/974753-34301826.pdf?src-supplier=Jameco, ComponentLink4URL=https://datasheet.ciiva.com/34301/974753-34301826.pdf?src-supplier=Jameco, ComponentLink5Description=https://datasheet.ciiva.com/910/mbr0530-910516.pdf?src-supplier=Digi-Key, ComponentLink5URL=https://datasheet.ciiva.com/910/mbr0530-910516.pdf?src-supplier=Digi-Key, ComponentLink6Description=https://datasheet.ciiva.com/25931/mbr0530-25931989.pdf?src-supplier=Avnet+Europe, ComponentLink6URL=https://datasheet.ciiva.com/25931/mbr0530-25931989.pdf?src-supplier=Avnet+Europe, ComponentLink7Description=https://datasheet.ciiva.com/8300/mbr0530-8300905.pdf?src-supplier=Avnet, ComponentLink7URL=https://datasheet.ciiva.com/8300/mbr0530-8300905.pdf?src-supplier=Avnet, ComponentLink8Description=https://datasheet.ciiva.com/17318/mbr0530-17318568.pdf?src-supplier=Future+Electronics, ComponentLink8URL=https://datasheet.ciiva.com/17318/mbr0530-17318568.pdf?src-supplier=Future+Electronics, ComponentLink9Description=https://datasheet.ciiva.com/15144/getdatasheetpartid-86760-15144598.pdf?src-supplier=Verical, ComponentLink9URL=https://datasheet.ciiva.com/15144/getdatasheetpartid-86760-15144598.pdf?src-supplier=Verical, ComponentLink10Description=https://datasheet.ciiva.com/910/mbr0530-910518.pdf?src-supplier=Digi-Key, ComponentLink10URL=https://datasheet.ciiva.com/910/mbr0530-910518.pdf?src-supplier=Digi-Key, Contact Plating=Tin,Matte, Current Rating=500mA, Design Item ID=DSC-0.5/30-SOD123, Element Configuration=Single, Forward Current=500mA, Height=1.03mm, Lead Free="Lead Free", Length=2.7mm, Max Reverse Leakage Current=130uA, Max Reverse Voltage (DC)=30V, Max Surge Current=5.5A, Mount="Surface Mount", Output Current=500mA, Peak Non-Repetitive Surge Current=5.5A, Polarity=Standard, Pricing 1="1=0,34400, 10=0,23900, 100=0,12200, 500=0,10000 (USD)", Radiation Hardening=No, REACH SVHC="No SVHC", RoHS Compliant=Yes, Series=-, Source="Filter components.SchLib", Stock 1=9, Voltage Rating (DC)=30V, Weight=0.03g, Width=1.6mm
D3: library part CMP-00131-3, "Led, Green, 520 Nm, 3.2 V, 30 Ma, 450 Mcd Rohs Compliant: Yes", Case Code (Imperial)=0805, Case Code (Metric)=2012, Color=Green, Forward Current=30mA, Forward Voltage=3.2V, Manufacturer 1="Wurth Electronics", Manufacturer Part Number 1=150080GS75000, Max Operating Temperature=85°C, Min Operating Temperature=-40°C, Package Quantity=4000, Test Current=20mA, .Creator=GP, Case/Package=0805, Category=LEDs, ComponentLink1Description=Datasheet, ComponentLink1URL=https://www.we-online.com/catalog/datasheet/150080GS75000.pdf, ComponentLink2Description="Where buy it", ComponentLink2URL=https://katalog.we-online.de/en/led/WL-SMCW/150080GS75000, ComponentLink3Description=https://datasheet.ciiva.com/29563/150080gs75000-29563008.pdf?src-supplier=Digi-Key, ComponentLink3URL=https://datasheet.ciiva.com/29563/150080gs75000-29563008.pdf?src-supplier=Digi-Key, ComponentLink4Description=https://datasheet.ciiva.com/29279/759434-da-01-en-chipled-0805-w-kl-gruen-150080gs75000-29279039.pdf?src-supplier=Conrad, ComponentLink4URL=https://datasheet.ciiva.com/29279/759434-da-01-en-chipled-0805-w-kl-gruen-150080gs75000-29279039.pdf?src-supplier=Conrad, Design Item ID=LEDGS-0805-450, Dominant Wavelength=520nm, Height=0.7mm, Length=2mm, Lens Style=Clear,Rectangular, Luminous Intensity=450mcd, Mount="Surface Mount", Packaging="Cut Tape", Pricing 1="50=0,19300, 500=0,12900, 1000=0,12300, 2000=0,11700, 4000=0,11100 (USD)", REACH SVHC=Unknown, RoHS=Yes, RoHS Compliant=Yes, Source=Semiconductor.SchLib, Stock 1=4350, Viewing Angle=140°, Wavelength=520nm, Width=1.25mm
F1: library part CMP-001-00020-3, "Fuse, 24 Milliohms to 660 Milliohms (Cold) @ 0.1, 32 V, 0805, 15 C, 35 C", Case/Package=0805, Current Rating=500mA, Max Operating Temperature=125°C, Min Operating Temperature=15°C, Mounting Technology="Surface Mount,PCB", Pins=2, RoHS Compliant=Yes
F3: library part CMP-00161-2, "Surface Mount Fuses 600V 1A Fast Acting", Case/Package=SMD/SMT, Current Rating=1A, DC Cold Resistance=304.4mR, Manufacturer 1=Littelfuse, Manufacturer Part Number 1=0485001.DR, Max Operating Temperature=125°C, Min Operating Temperature=-55°C, Package Quantity=1, Resistance=0.264, Voltage Rating=600V, Voltage Rating (AC)=250V, .Creator=DO, Approvals=UL,CSA, Body Material=Ceramic, Category=Fuses, ComponentLink1Description=http://www.farnell.com/datasheets/1945989.pdf?src-supplier=Farnell, ComponentLink1URL=http://www.farnell.com/datasheets/1945989.pdf?src-supplier=Farnell, ComponentLink2Description=http://www.farnell.com/datasheets/2282568.pdf?src-supplier=Farnell, ComponentLink2URL=http://www.farnell.com/datasheets/2282568.pdf?src-supplier=Farnell, ComponentLink3Description=http://www.mouser.com/ds/2/240/Littelfuse485_datasheet_080512-201879.pdf?src-supplier=Mouser, ComponentLink3URL=http://www.mouser.com/ds/2/240/Littelfuse485_datasheet_080512-201879.pdf?src-supplier=Mouser, ComponentLink4Description=http://components.arrow.com/part/dataview/56707787S790276N3675?src-supplier=Arrow+Electronics, ComponentLink4URL=http://components.arrow.com/part/dataview/56707787S790276N3675?src-supplier=Arrow+Electronics, ComponentLink5Description=http://www.littelfuse.com/~/media/Files/Littelfuse/Technical%20Resources/Documents/Data%20Sheets/Littelfuse_Fuse_485_Datasheet.pdf?src-supplier=Element14, ComponentLink5URL=http://www.littelfuse.com/~/media/Files/Littelfuse/Technical%20Resources/Documents/Data%20Sheets/Littelfuse_Fuse_485_Datasheet.pdf?src-supplier=Element14, ComponentLink6Description=http://www.littelfuse.com/~/media/electronics/datasheets/fuses/littelfuse_fuse_485_datasheet.pdf.pdf?src-supplier=Digi-Key, ComponentLink6URL=http://www.littelfuse.com/~/media/electronics/datasheets/fuses/littelfuse_fuse_485_datasheet.pdf.pdf?src-supplier=Digi-Key, Depth=4.5mm, Design Item ID=Fuse_1A_600V, Fuse Current=1A, Fuse Type="Board Mount (Cartridge Style Excluded)", Height=0.177inch, Housing Material=Ceramic, Lead Free="Lead Free", Length=12.1mm, Mount="Surface Mount", Packaging="Tape and Reel", Pricing 1="1=2,82900, 5=2,81400, 10=2,75200, 50=2,59800, 100=2,40300, 250=2,37900, 500=2,30400, 1500=2,24900, 3000=2,11600 (USD)", REACH SVHC="No SVHC", RoHS=Yes, RoHS Compliant=Yes, Series=485, Source="Filter components.SchLib", Stock 1=4123, Termination=SMD/SMT, Voltage Rating (DC)=600V, Width=0.177inch
J1: library part CMP-00020-3, "Nano-Fit Vertical Header Through Hole 2.50mm Pitch Dual Row 16 Circuits with Kinked Pins Tin (Sn) Plating Black", Insulation Color=Black, Manufacturer 1=Molex, Manufacturer Part Number 1=105310-1116, Max Operating Temperature=105°C, Min Operating Temperature=-40°C, .Creator=AC, Category="Headers and Wire Housings", ComponentLink1Description=https://www.molex.com/pdm_docs/sd/1053101210_sd.pdf?src-supplier=Digi-Key, ComponentLink1URL=https://www.molex.com/pdm_docs/sd/1053101210_sd.pdf?src-supplier=Digi-Key, ComponentLink2Description=Molex, ComponentLink2URL=https://www.molex.com/molex/products/part-detail/pcb_headers/1053101116, Connector Type="Header,Male Pin", Contact Material=Brass, Contact Plating=Tin, Contact Shape=Square, Design Item ID=J_NanoFit_2x8_V, Fastening Type=Latch, Insulation Material=Polymer, Mount="Through Hole", Number of Positions=16, Number of Rows=2, Packaging=Tray, Pricing 1="1=3,21000, 10=2,82400, 84=2,24619, 1008=1,86110, 4956=1,66858 (USD)", RoHS=No, Source=Electromechanical.SchLib, Stock 1=84, Termination="Kinked Pin"
J2 J5: library part CMP-00012-1, "Header 1 Row Vertical Polarizing Peg 2 Pin SMT/Glow Wire Compatible Tin Plate", Manufacturer 1=Molex, Manufacturer Part Number 1=43650-0215, Category="Headers and Wire Housings", ComponentLink1Description=https://datasheet.ciiva.com/19462/884109-19462034.pdf?src-supplier=Jameco, ComponentLink1URL=https://datasheet.ciiva.com/19462/884109-19462034.pdf?src-supplier=Jameco, ComponentLink2Description=https://datasheet.ciiva.com/5157/0436500215-pcb-headers-148687-5157608.pdf?src-supplier=Mouser, ComponentLink2URL=https://datasheet.ciiva.com/5157/0436500215-pcb-headers-148687-5157608.pdf?src-supplier=Mouser, ComponentLink3Description=https://datasheet.ciiva.com/16085/0436500215-pcb-headers-16085668.pdf?src-supplier=Onlinecomponents.com, ComponentLink3URL=https://datasheet.ciiva.com/16085/0436500215-pcb-headers-16085668.pdf?src-supplier=Onlinecomponents.com, ComponentLink4Description=https://datasheet.ciiva.com/11748/0900766b80307ce2-11748388.pdf?src-supplier=RSComponents, ComponentLink4URL=https://datasheet.ciiva.com/11748/0900766b80307ce2-11748388.pdf?src-supplier=RSComponents, ComponentLink5Description=https://datasheet.ciiva.com/9432/0436500215-pcb-headers-9432850.pdf?src-supplier=Avnet, ComponentLink5URL=https://datasheet.ciiva.com/9432/0436500215-pcb-headers-9432850.pdf?src-supplier=Avnet, ComponentLink6Description=https://datasheet.ciiva.com/7920/1889390-7920892.pdf?src-supplier=Element14, ComponentLink6URL=https://datasheet.ciiva.com/7920/1889390-7920892.pdf?src-supplier=Element14, Design Item ID=J_MicroFit_2x1, Pricing 1="1=0,87800, 10=0,74400, 80=0,63070, 3264=0,47000, 6528=0,45100, 13056=0,41760 (USD)", RoHS=Yes, Source=Electromechanical.SchLib, Stock 1=11086
J3 J4 J6: library part CMP-002-00001-2, "Conn HDR 2 POS 2.5mm Solder ST Thru-Hole 2 Terminal 1 Port Nano-Fit Tray"
J701: library part CMP-002-00009-1, "Board Connector, 3 Contact(s), 1 Row(s), Male, Straight, 0.1 inch Pitch, Solder Terminal, Locking, Black Insulator, Plug", Max Operating Temperature=125°C, Min Operating Temperature=-40°C, Connector Type="BOARD CONNECTOR", Mounting Technology=Board, RoHS Compliant=Yes
L1: library part CMP-006-00002-2, "General Purpose Inductor, 3.3uH, 20%, 1 Element, Ferrite-Core, SMD. 744777003", Max Current Rating=5A, Max Operating Temperature=125°C, Min Operating Temperature=-40°C, Self Resonant Frequency=55MHz, Tolerance=20%, Pins=2, RoHS Compliant=Yes
MH1 MH2 MH3 MH4: library part CMP-00040-2, Design Item ID=Mounting_Hole_M3, Source=Electromechanical.SchLib
Q1 Q501 Q502: library part CMP-00142-1, "Automotive N-channel 40 V (d-s) 175C Mosfet SOT-23", Manufacturer 1=Vishay, Manufacturer Part Number 1=SQ2318BES-T1_GE3, .Creator=DO, ComponentLink1Description="Where to buy", ComponentLink1URL=https://www.mouser.es/ProductDetail/Vishay-Siliconix/SQ2318BES-T1_GE3?qs=sPbYRqrBIVmyZcxPsDt0vA%3D%3D, ComponentLink2Description=Datasheet, ComponentLink2URL=https://www.mouser.es/datasheet/2/427/sq2318bes-1868475.pdf, Design Item ID=TRT-NCH-8/40-SQ, Pricing 1="1=0,71500, 5=0,71500, 10=0,64400, 25=0,59000, 50=0,52500, 100=0,47100, 250=0,40800 (USD)", RoHS=No, Source=Semiconductor.SchLib, Vds=40V
Q201 Q202: library part CMP-00144-2, "Infineon’s highly innovative OptiMOS™ families include p-channel power MOSFETs, SOT-23-3, RoHS", Case/Package=TO-236-3, Continuous Drain Current (ID)=2A, Drain to Source Voltage (Vdss)=30V, Gate to Source Voltage (Vgs)=20V, Input Capacitance=500pF, Manufacturer=Infineon, Manufacturer Part Number=BSS308PEH6327, Max Operating Temperature=150°C, Max Power Dissipation=500mW, Min Operating Temperature=-55°C, Package Quantity=1, Threshold Voltage=-1.5V, .Creator=DO, Category=MOSFETs, ComponentLink1Description=datasheet, ComponentLink1URL=https://datasheet.ciiva.com/6379/infineon-bss308pe-ds-v02-03-en-6379920.pdf?src-supplier=Digi-Key, ComponentLink2Description=https://datasheet.ciiva.com/11171/infineon-bss308pe-ds-v02-03-en-11171385.pdf?src-supplier=Avnet, ComponentLink2URL=https://datasheet.ciiva.com/11171/infineon-bss308pe-ds-v02-03-en-11171385.pdf?src-supplier=Avnet, Design Item ID=TRT-PCH-2/30-BSS, Fall Time=2.8ns, Mount="Surface Mount", Number of Pins=3, Packaging="Tape and Reel", Pricing 1="50=0,50300, 100=0,26400, 250=0,25900, 500=0,25200, 1000=0,24700 (USD)", Rds On Max=80mR, REACH SVHC="No SVHC", Rise Time=7.7ns, RoHS=Yes, Series=OptiMOS™, Source=Semiconductor.SchLib, Stock 1=4000, Turn-Off Delay Time=15.3ns, Turn-On Delay Time=5.6ns
Q601 Q801: library part CMP-00139-1, "MOSFET N-CH 100V 31A DPAK", Case/Package=TO-252-3, Continuous Drain Current (ID)=31A, Drain to Source Breakdown Voltage=100V, Drain to Source Resistance=39mR, Gate to Source Voltage (Vgs)=20V, Input Capacitance=1.69nF, Manufacturer 1=Infineon, Manufacturer Part Number 1=IRFR3410TRPBF, Max Operating Temperature=175°C, Max Power Dissipation=3W, Min Operating Temperature=-55°C, Power Dissipation=110W, Threshold Voltage=4V, Category=MOSFETs, ComponentLink1Description=Datasheet, ComponentLink1URL=https://www.mouser.es/datasheet/2/427/sq2318bes-1868475.pdf, Design Item ID=TRT-NCH-31/100, Drain to Source Voltage (Vdss)=100V, Halogen Free="Halogen Free", Height=0.094inch, Lead Free="Contains Lead", Length=0.264inch, Max Dual Supply Voltage=100V, Mount="Surface Mount", Number of Pins=3, Packaging="Cut Tape", Polarization=N, Pricing 1="1=1,20000, 10=1,08000, 100=0,84200, 500=0,69600 (EUR)", Rds On Max=39mR, Reach SVHC Compliant=Yes, RoHS=Yes, RoHS Compliant=Yes, Series=HEXFET®, Source=Semiconductor.SchLib, Stock 1=4070, Turn-Off Delay Time=40ns, Turn-On Delay Time=12ns, Width=0.245inch
Q701: library part CMP-00195-1, "Transistor Output Optocoupler. S/N: 140100146000", RoHS Compliant=Yes
R1 R2 R201 R202 R702 R706: library part CMP-00085-4, "BOURNS         CR0805-JW-103ELF            Surface Mount Chip Resistor, Thick Film, CR Series, 10 kohm, 125 mW,  5%, 150 V", Case Code (Metric)=2012, Case/Package=0805, Manufacturer 1=Bourns, Manufacturer Part Number 1=CR0805-JW-103ELF, Max Operating Temperature=155°C, Max Power Dissipation=125mW, Min Operating Temperature=-55°C, Package Quantity=1, Resistance Tolerance=5%, Resistor Type="Thick Film", Temperature Coefficient=200ppm/°C, Voltage Rating=150V, Voltage Rating (DC)=100V, .Creator=DR, Category="Chip SMD Resistors", ComponentLink1Description=https://datasheet.ciiva.com/11821/0900766b80fcdb72-11821135.pdf?src-supplier=RSComponents, ComponentLink1URL=https://datasheet.ciiva.com/11821/0900766b80fcdb72-11821135.pdf?src-supplier=RSComponents, ComponentLink2Description=https://datasheet.ciiva.com/9122/chpreztr-9122374.pdf?src-supplier=Avnet, ComponentLink2URL=https://datasheet.ciiva.com/9122/chpreztr-9122374.pdf?src-supplier=Avnet, ComponentLink3Description=https://datasheet.ciiva.com/22693/1902866-22693254.pdf?src-supplier=Element14, ComponentLink3URL=https://datasheet.ciiva.com/22693/1902866-22693254.pdf?src-supplier=Element14, ComponentLink4Description=https://datasheet.ciiva.com/7986/691949-7986187.pdf?src-supplier=Element14, ComponentLink4URL=https://datasheet.ciiva.com/7986/691949-7986187.pdf?src-supplier=Element14, ComponentLink5Description=https://datasheet.ciiva.com/30065/159chpreztr-30065976.pdf?src-supplier=Onlinecomponents.com, ComponentLink5URL=https://datasheet.ciiva.com/30065/159chpreztr-30065976.pdf?src-supplier=Onlinecomponents.com, ComponentLink6Description=https://datasheet.ciiva.com/16783/70154685-16783482.pdf?src-supplier=Allied+Electronics, ComponentLink6URL=https://datasheet.ciiva.com/16783/70154685-16783482.pdf?src-supplier=Allied+Electronics, ComponentLink7Description=https://datasheet.ciiva.com/5548/chpreztr-5548491.pdf?src-supplier=Mouser, ComponentLink7URL=https://datasheet.ciiva.com/5548/chpreztr-5548491.pdf?src-supplier=Mouser, ComponentLink8Description=https://datasheet.ciiva.com/6559/chpreztr-6559900.pdf?src-supplier=Digi-Key, ComponentLink8URL=https://datasheet.ciiva.com/6559/chpreztr-6559900.pdf?src-supplier=Digi-Key, ComponentLink9Description=https://datasheet.ciiva.com/6559/chpreztr-6559901.pdf?src-supplier=Digi-Key, ComponentLink9URL=https://datasheet.ciiva.com/6559/chpreztr-6559901.pdf?src-supplier=Digi-Key, ComponentLink10Description=https://datasheet.ciiva.com/7985/1856384-7985869.pdf?src-supplier=Element14, ComponentLink10URL=https://datasheet.ciiva.com/7985/1856384-7985869.pdf?src-supplier=Element14, ComponentLink11Description=https://datasheet.ciiva.com/48692/001055517-da-01-en-smd-wid-cr0805-jw-103elf-10k-ohm-1-8w-48692118.pdf?src-supplier=Conrad, ComponentLink11URL=https://datasheet.ciiva.com/48692/001055517-da-01-en-smd-wid-cr0805-jw-103elf-10k-ohm-1-8w-48692118.pdf?src-supplier=Conrad, Construction=Rectangular, Contact Plating=Tin, Depth=1.25mm, Design Item ID=R10k-0805FTK, Features="Moisture Resistant", Height=0.5mm, Length=2mm, Military Standard=Not, Mount="Surface Mount", Number of Terminations=2, Packaging="Tape and Reel", Pins=2, Power rating=125mW, Pricing 1="1=0,05790, 10=0,01540, 25=0,01340, 100=0,00340 (USD)", Radiation Hardening=No, REACH SVHC="No SVHC", RoHS=Yes, RoHS Compliant=Yes, Series=CR0805, Source=Passives.SchLib, Stock 1=57566, Technology="THICK FILM", Termination=SMD/SMT, Thickness=508um, Tolerance=5%, Width=1.25mm
R3 R5 R7 R9: library part CMP-009-00003-4, "Fixed Resistor, Metal Glaze/thick Film, 0.125W, 100000ohm, 150V, 5% +/-Tol, 200ppm/Cel, Surface Mount, 0805", Case/Package=0805, Max Operating Temperature=155°C, Min Operating Temperature=-55°C, Power=125mW, Tolerance=5%, Mounting Technology="Surface Mount", Pins=2, RoHS Compliant=Yes
R10: library part CMP-009-00034-5, "Res, 10R, 5%, 0.25W, Thick Film, 0805;", Resistance=10
R11 R203 R204 R506 R511: library part CMP-009-00043-2, "Fixed Resistor, Metal Glaze/thick Film, 0.5W, 1000ohm, 150V, 1% +/-Tol, 100ppm/Cel, Surface Mount, 0805", Case/Package=0805, Max Operating Temperature=155°C, Min Operating Temperature=-55°C, Power=500mW, Tolerance=1%, Mounting Technology="Surface Mount", Pins=2, RoHS Compliant=Yes
R501 R502 R503 R504 R512 R513 R602 R802: library part CMP-00076-3, "Res Thick Film 0805 1K Ohm 5% 1/8W ±200ppm/°C Molded SMD SMD Paper Tape on Plastic Reel", Case Code (Metric)=2012, Case/Package=0805, Manufacturer 1=Bourns, Manufacturer Part Number 1=CR0805-JW-102ELF, Max Operating Temperature=155°C, Max Power Dissipation=125mW, Min Operating Temperature=-55°C, Package Quantity=1, Resistor Type="Thick Film", Temperature Coefficient=200ppm/°C, Tolerance=5%, Voltage Rating=150V, .Creator=GP, Category="Chip SMD Resistors", ComponentLink1Description=https://datasheet.ciiva.com/11821/0900766b80fcdb72-11821134.pdf?src-supplier=RSComponents, ComponentLink1URL=https://datasheet.ciiva.com/11821/0900766b80fcdb72-11821134.pdf?src-supplier=RSComponents, ComponentLink2Description=https://datasheet.ciiva.com/15225/getdatasheetpartid-78155-15225381.pdf?src-supplier=Verical, ComponentLink2URL=https://datasheet.ciiva.com/15225/getdatasheetpartid-78155-15225381.pdf?src-supplier=Verical, ComponentLink3Description=https://datasheet.ciiva.com/22693/1902866-22693253.pdf?src-supplier=Element14, ComponentLink3URL=https://datasheet.ciiva.com/22693/1902866-22693253.pdf?src-supplier=Element14, ComponentLink4Description=https://datasheet.ciiva.com/7986/1856384-7986184.pdf?src-supplier=Element14, ComponentLink4URL=https://datasheet.ciiva.com/7986/1856384-7986184.pdf?src-supplier=Element14, ComponentLink5Description=https://datasheet.ciiva.com/7985/1856384-7985867.pdf?src-supplier=Element14, ComponentLink5URL=https://datasheet.ciiva.com/7985/1856384-7985867.pdf?src-supplier=Element14, ComponentLink6Description=https://datasheet.ciiva.com/30242/159chpreztr-30242765.pdf?src-supplier=Onlinecomponents.com, ComponentLink6URL=https://datasheet.ciiva.com/30242/159chpreztr-30242765.pdf?src-supplier=Onlinecomponents.com, ComponentLink7Description=https://datasheet.ciiva.com/6547/chpreztr-6547359.pdf?src-supplier=Digi-Key, ComponentLink7URL=https://datasheet.ciiva.com/6547/chpreztr-6547359.pdf?src-supplier=Digi-Key, Contact Plating=Tin, Depth=1.25mm, Design Item ID=R1k-0805FTK, Features="Moisture Resistant", Height=0.5mm, Lead Free="Lead Free", Length=2mm, Military Standard=Not, Mount="Surface Mount", Number of Terminations=2, Packaging="Tape and Reel", Pins=2, Power rating=125mW, Pricing 1="1=0,05930, 10=0,03510, 25=0,01790, 100=0,00800, 250=0,00790, 500=0,00590, 1000=0,00360, 3000=0,00350, 6000=0,00250 (USD)", Radiation Hardening=No, REACH SVHC="No SVHC", RoHS=Yes, Source=Passives.SchLib, Stock 1=27510, Termination=SMD/SMT, Thickness=508um, Voltage Rating (DC)=150V, Width=1.25mm
R505: library part CMP-009-00046-1, "Fixed Resistor, Metal Glaze/thick Film, 0.125W, 12400ohm, 150V, 1% +/-Tol, 100ppm/Cel, Surface Mount, 0805", Case/Package=0805, Max Operating Temperature=155°C, Min Operating Temperature=-55°C, Power=125mW, Tolerance=1%, Mounting Technology="Surface Mount", Pins=2, RoHS Compliant=Yes